# EAGLE board Project_Milestone04 v5.0.0 (EAGLE 9.2.0)
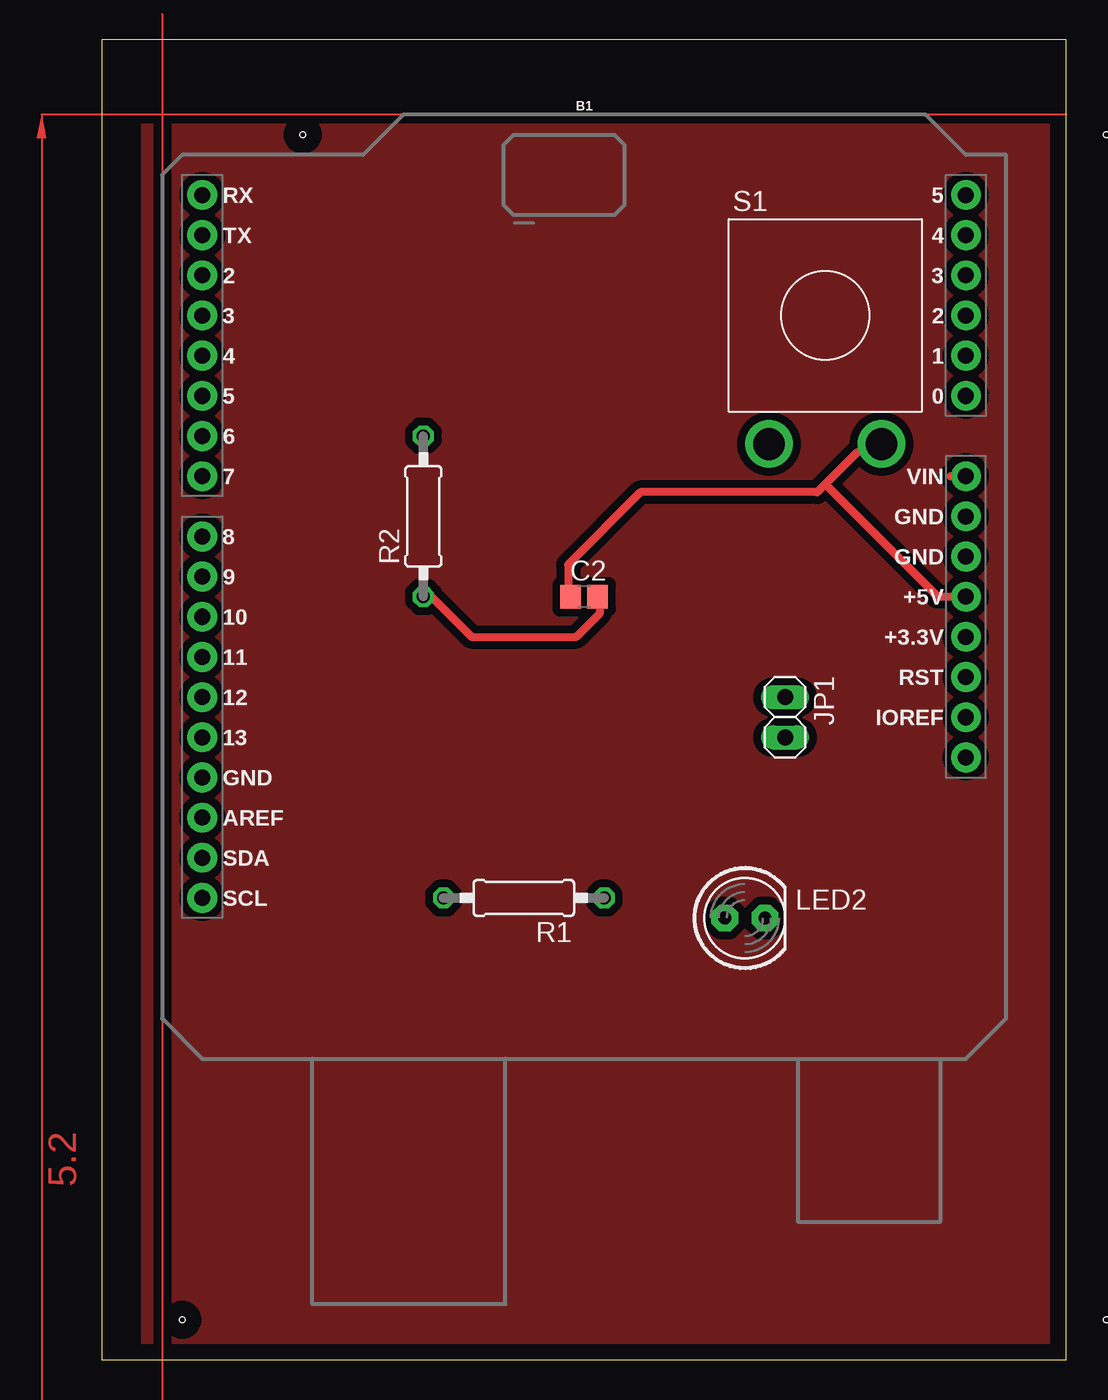
[diagram p0: board, top side]
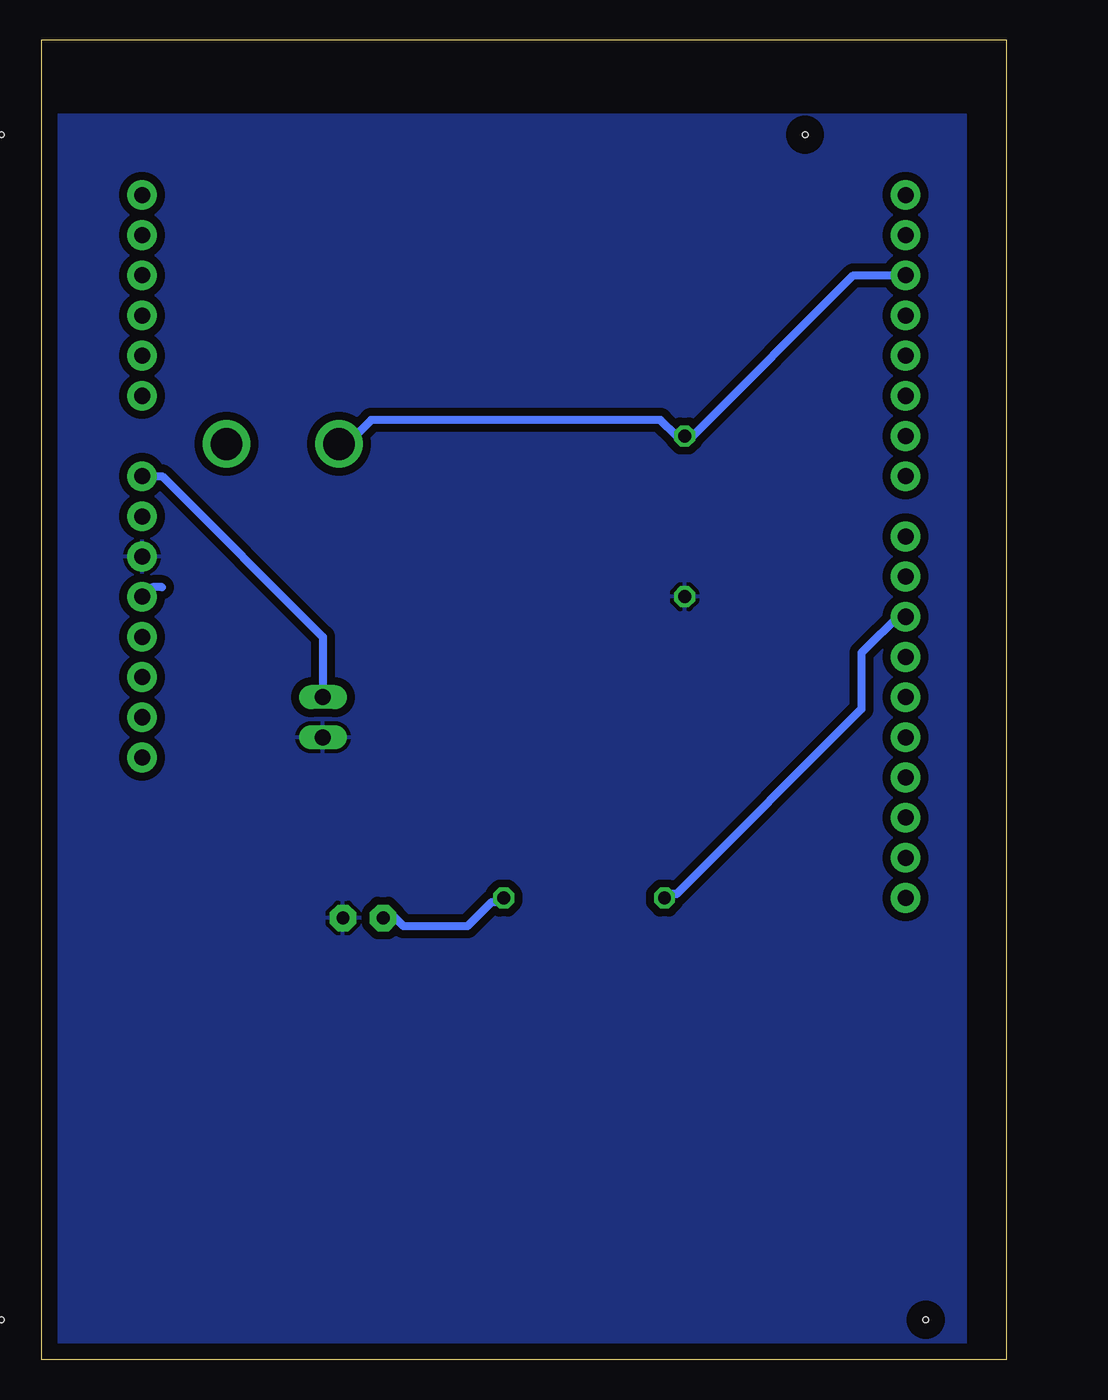
[diagram p1: board, bottom side, seen from below]

Size 60.94 x 83.49 mm. Coordinates in mm from the lower left corner, seen from the top.
Outline: 0,0 60.94,0 60.94,83.49 0,83.49 0,0
Copper layers (1*16): Top 0.035mm / dielectric 1.5mm / Bottom 0.035mm
Design rules "default": minimum track width 6mil, minimum drill 0.35mm, track to track 6mil, track to pad 6mil, pad to pad 6mil, via to via 6mil, smd to smd 6mil, copper to edge 40mil, drill to drill 6mil, minimum pad ring 10mil, minimum via ring 8mil, stop-mask expansion 4mil, vias tented up to drill 0mil, thermal gap 10mil
Net classes: 0 default: width 0.508 mm, drill 0.508 mm, clearance 0.508 mm
Holes 0.35 mm at 5.08,2.54 63.5,2.54 12.7,77.47 63.5,77.47

## Footprints (pad centres in the part's own frame; a part is rotated, then mirrored left to right if it is on the bottom)
UNO_R3_SHIELD = drill 1.016 pad 1.88: 3.3V 24.13,-2.54; 5V 24.13,0; A0 24.13,12.7; A1 24.13,15.24; A2 24.13,17.78; A3 24.13,20.32; A4 24.13,22.86; A5 24.13,25.4; AREF -24.13,-13.97; D2 -24.13,20.32; D3 -24.13,17.78; D4 -24.13,15.24; D5 -24.13,12.7; D6 -24.13,10.16; D7 -24.13,7.62; D8 -24.13,3.81; D9 -24.13,1.27; D10 -24.13,-1.27; D11 -24.13,-3.81; D12 -24.13,-6.35; D13 -24.13,-8.89; GND@0 24.13,2.54; GND@1 24.13,5.08; GND@2 -24.13,-11.43; IOREF 24.13,-7.62; NC 24.13,-10.16; RES 24.13,-5.08; RX -24.13,25.4; SCL -24.13,-19.05; SDA -24.13,-16.51; TX -24.13,22.86; VIN 24.13,7.62
C0805 = smd 1.3 x 1.5: 1 -0.85,0; 2 0.85,0
1X02 = drill 1.016 long: 1 -1.27,0; 2 1.27,0
LED5MM = drill 0.813 pad 1.676 octagon: A -1.27,0; K 1.27,0
0207/10 = drill 0.813 octagon: 1 -5.08,0; 2 5.08,0
JUDCOSPST = drill 2: P 3.556,-8.128; T -3.556,-8.128

## Placement (x,y rotation side)
B1  ARDUINO_UNO_R3_SHIELDBASIC  [UNO_R3_SHIELD]  30.48,48.26 0 top
C2  10F  [C0805]  30.48,48.26 0 top
JP1  [1X02]  43.18,40.64 270 top
LED2  [LED5MM]  40.64,27.94 0 top
R1  100k  [0207/10]  26.67,29.21 180 top
R2  100k  [0207/10]  20.32,53.34 90 top
S1  SPST  [JUDCOSPST]  45.72,66.04 0 top

## Library data of the parts
B1 = SparkFun-Boards
C2 LED2 S1 = adafruit
JP1 = pinhead
R1 R2 = rcl; SPICEPREFIX: R

## Nets
GND: B1.GND@0 C2.2 JP1.2 LED2.K R2.1
N$1: B1.VIN JP1.1
N$2: B1.D10 R1.2
N$4: LED2.A R1.1
N$7: B1.D2 R2.2 S1.T
VCC: B1.5V C2.1 S1.P

## Tracks (layer width: path | path; a pad name or v marks a point on that pad's centre or on a via)
GND
  Top 0.508: R2.1 20.83,48.26 23.37,45.72 29.97,45.72 31.5,47.24 31.5,48.26 C2.2
  pour Bottom: 2.54,78.74 2.54,0 60.96,0 60.96,78.74
N$1
  Top 0.508: B1.VIN 53.64,55.88 | 43.28,42.16 JP1.1
  Bottom 0.508: JP1.1 43.18,45.72 53.34,55.88 53.85,55.88 54.36,56.39 54.86,55.88 B1.VIN
N$2
  Top 0.508: 6.4,47.04 B1.D10
  Bottom 0.508: R1.2 21.34,29.46 20.83,29.46 9.14,41.15 9.14,44.7 6.6,47.24 B1.D10
N$3
  pour Top: 2.54,78.74 2.54,0 60.96,0 60.96,78.74
N$4
  Bottom 0.508: 39.12,27.84 LED2.A 39.62,27.94 39.12,28.45 38.1,27.43 34.04,27.43 32.51,28.96 32,28.96 R1.1
N$7
  Bottom 0.508: 42.06,57.71 S1.T 41.66,57.91 40.13,59.44 21.84,59.44 20.83,58.42 R2.2 19.81,58.42 9.65,68.58 B1.D2
VCC
  Top 0.508: 45.72,55.37 47.75,57.4 48.77,57.4 S1.P | 45.72,55.37 45.21,54.86 34.04,54.86 29.46,50.29 29.46,48.26 C2.1 | B1.5V 52.83,48.26 45.72,55.37
  Bottom 0.508: 53.34,48.87 53.95,48.87 54.56,48.26 B1.5V | 49.68,57.71 49.38,57.71 S1.P
(copper drawn outside any net)
  shapes: Top area x2